# Altium PCB main_old.PcbDoc (part 5 of 15)
Units mil, origin at the board's own origin, x right, y up, seen from the top; angles counter-clockwise.
Board outline 8394.55 x 5164.44 mil, 7 copper layers (Top Layer 1, Layer 2, Layer 3, Unused, Layer 4_pow, Layer 5_gnd, Bottom 6+gnd), stack 46.112 mil thick; 363 components, 409 nets, 1750 pads, 991 vias.
Unrouted connection lines stored in the file: 1.
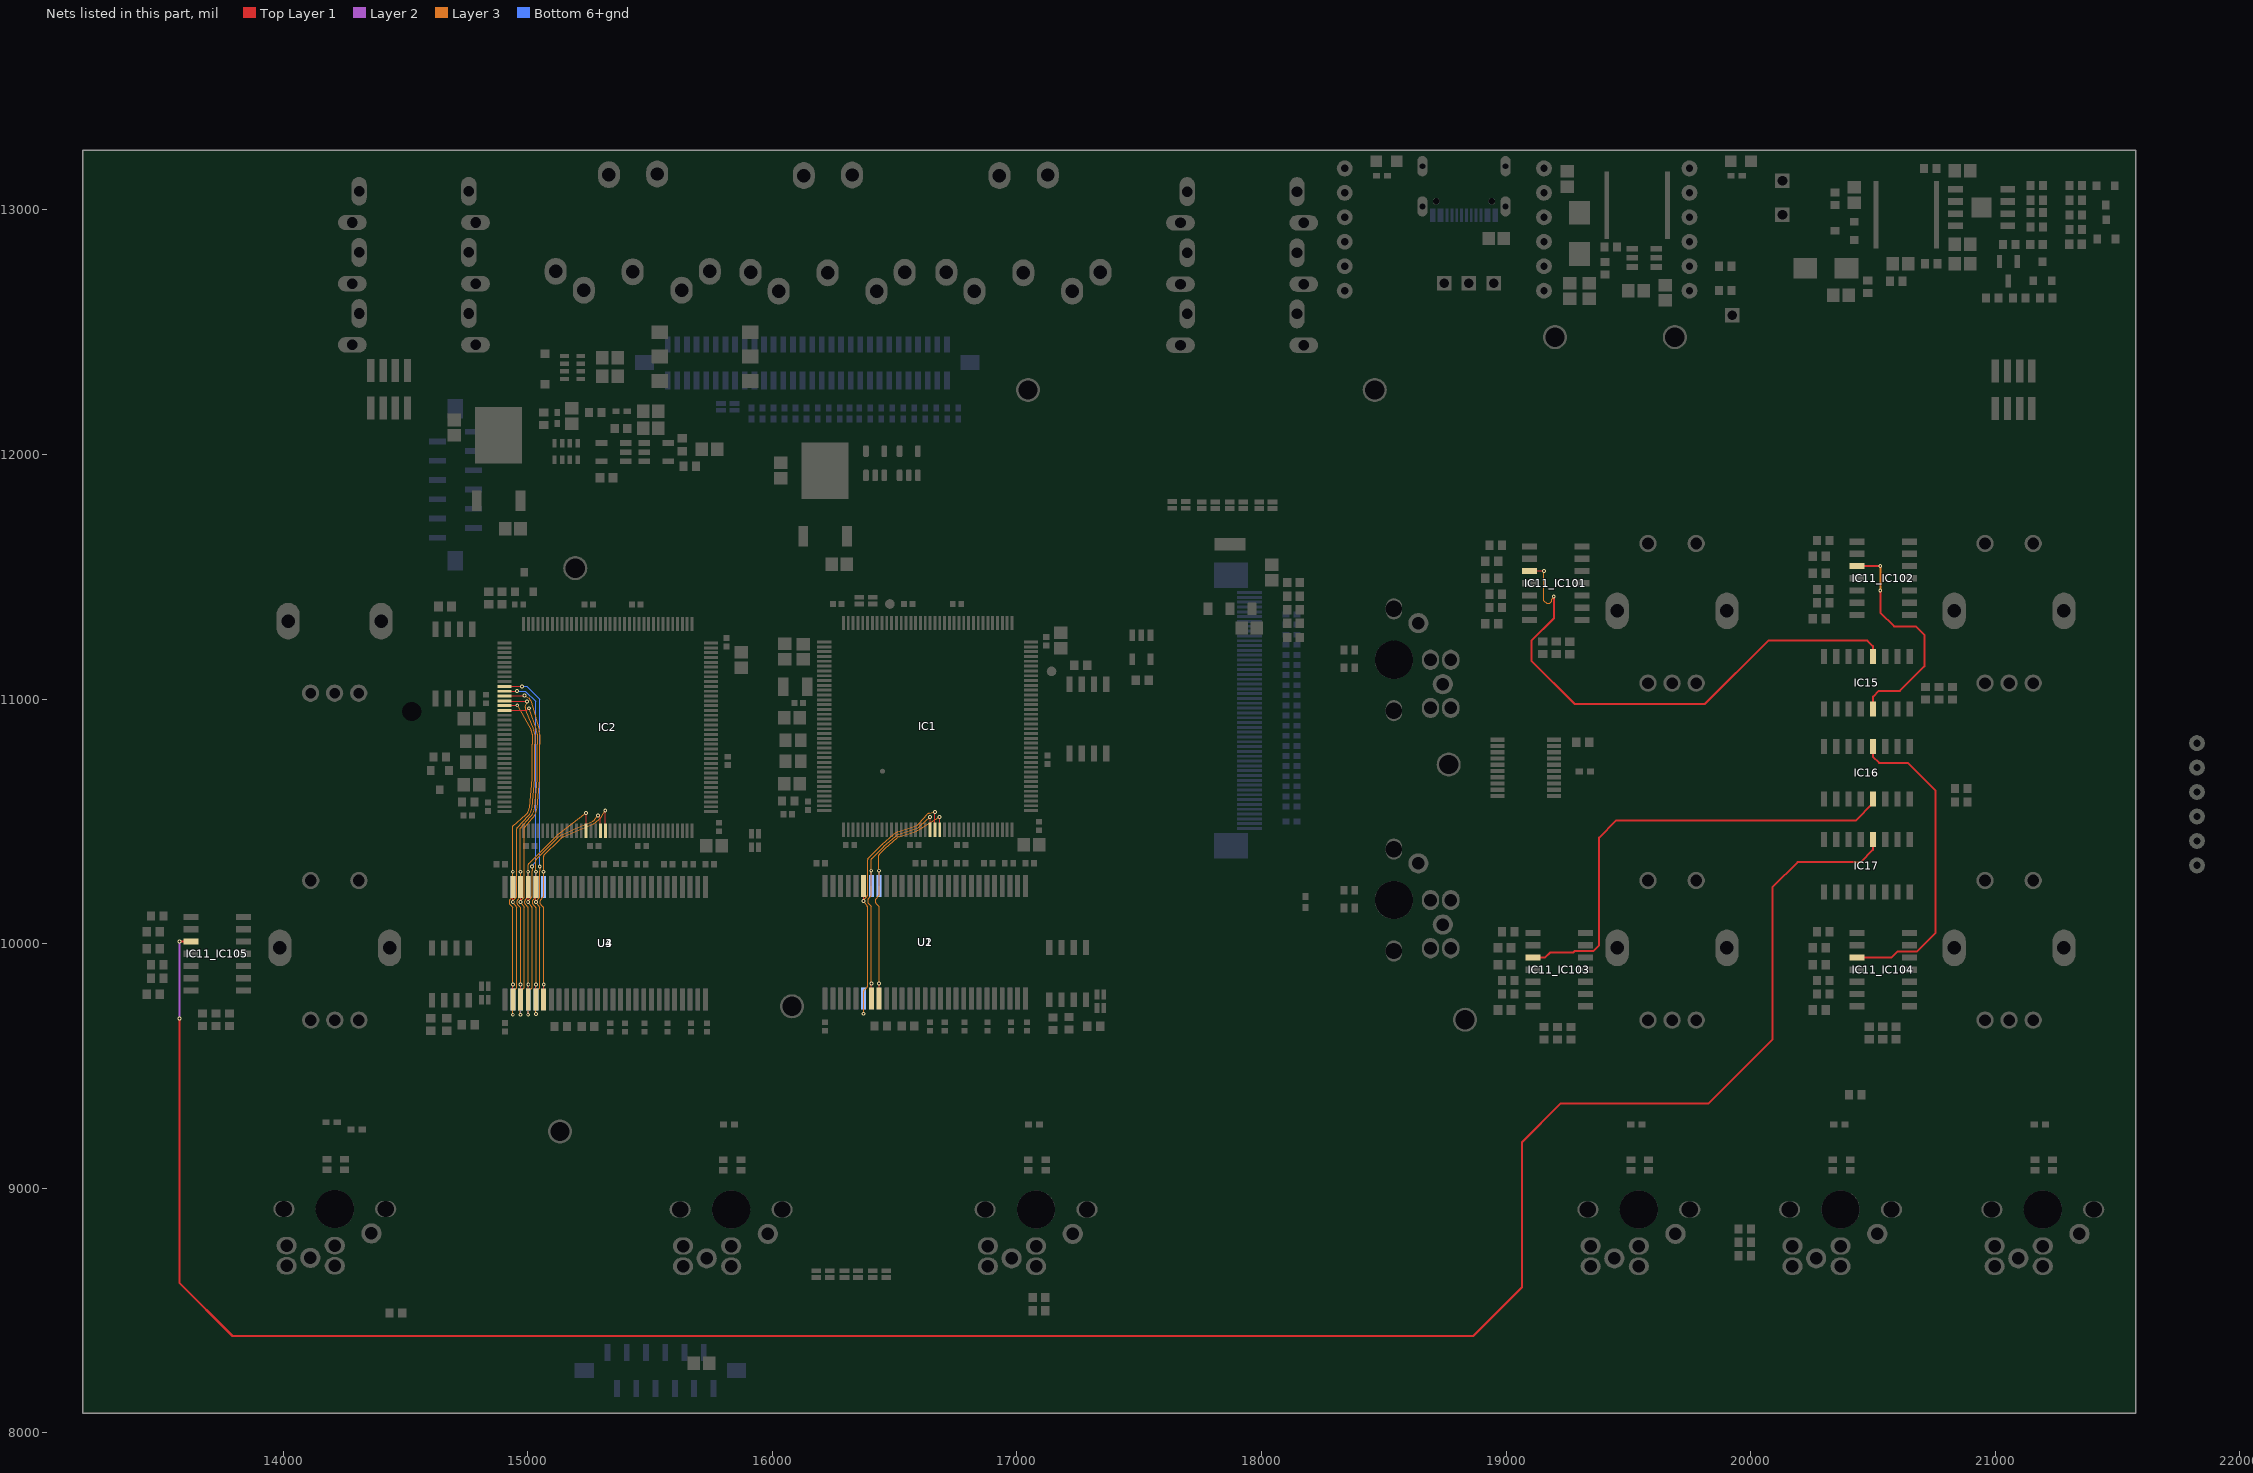
[diagram p8: the nets of this part, all layers, seen from the top]

## Via types
v1: diameter 15.75, hole 7.87, Top Layer 1 to Bottom 6+gnd, tented both sides, 923 vias
v2: diameter 27.56, hole 11.81, Top Layer 1 to Bottom 6+gnd, 45 vias
v3: diameter 23.62/23.62/23.62/23.62/23.62/23.62/23.62 (per signal layer), hole 12, Top Layer 1 to Bottom 6+gnd, tented top, 10 vias
v4: diameter 15.75, hole 7.87, Top Layer 1 to Bottom 6+gnd, 10 vias
v5: diameter 23.62/23.62/23.62/23.62/23.62/23.62/23.62 (per signal layer), hole 12, Top Layer 1 to Bottom 6+gnd, tented bottom, 3 vias

## Nets (pads, with @x,y where several pads share a name; then routed paths per layer and width w, separated by ;. In a path a pad name is that pad's centre, name@x,y a point inside that pad or via, vN(x,y) a via of type N, cw(c..) or ccw(c..) an arc to the next point about the centre after c; other vN are vias at no path point) (continued)
A9: IC1.55 U1.34 U2.34 | length 1531.6
  Top Layer 1 w5: U1.34@16404.53,9775.59 v1@16404.53,9837.43 ; U1.34@16404.77,9775.83 v1(16404.77,9837.68) ; U1.34@16405.02,9775.59 v1@16405.02,9837.43 ; IC1.55@16644.84,10466.06 v1@16644.84,10518.35
  Layer 3 w5: v1(16404.77,9837.68) 16404.77,10149.83 ; 16404.77,10199.75 16404.77,10297.82 v1(16404.28,10298.31) 16404.28,10344.65 ; v1(16644.61,10518.58) 16604.74,10481.61 cw(c16567.09,10522.2) 16584.26,10469.56 16515.96,10447.27 ; 16403.32,10153.31 cw(c16399.77,10149.78) 16404.77,10149.87 ; 16403.32,10153.31 cw(c16399.77,10149.78) 16404.77,10149.87 ; 16403.32,10153.31 cw(c16399.77,10149.78) 16404.77,10149.87 ; 16403.32,10153.31 cw(c16399.77,10149.78) 16404.77,10149.87 ; 16403.32,10153.31 cw(c16399.77,10149.78) 16404.77,10149.87 ; 16403.32,10153.31 cw(c16399.77,10149.78) 16404.77,10149.87 ; 16403.32,10153.31 cw(c16399.77,10149.78) 16404.77,10149.87 ; 16403.32,10153.31 cw(c16399.77,10149.78) 16404.77,10149.87 ; 16403.32,10153.31 cw(c16399.77,10149.78) 16404.77,10149.87 ; 16403.32,10153.31 cw(c16399.77,10149.78) 16404.77,10149.87 ; 16403.32,10153.31 cw(c16399.77,10149.78) 16404.77,10149.87 ; 16403.32,10153.31 cw(c16399.77,10149.78) 16404.77,10149.87 ; 16403.32,10153.31 cw(c16399.77,10149.78) 16404.77,10149.87 ; 16403.32,10153.31 cw(c16399.77,10149.78) 16404.77,10149.87 ; 16403.32,10153.31 cw(c16399.77,10149.78) 16404.77,10149.87 ; 16403.32,10153.31 cw(c16399.77,10149.78) 16404.77,10149.87 ; 16403.32,10153.31 16393.39,10163.28 cw(c16404.28,10174.13) 16392.76,10184.31 16403.52,10196.48 ; 16403.52,10196.48 ccw(c16399.77,10199.79) 16404.77,10199.7 ; 16403.52,10196.48 ccw(c16399.77,10199.79) 16404.77,10199.7 ; 16403.52,10196.48 ccw(c16399.77,10199.79) 16404.77,10199.7 ; 16403.52,10196.48 ccw(c16399.77,10199.79) 16404.77,10199.7 ; 16403.52,10196.48 ccw(c16399.77,10199.79) 16404.77,10199.7 ; 16403.52,10196.48 ccw(c16399.77,10199.79) 16404.77,10199.7 ; 16403.52,10196.48 ccw(c16399.77,10199.79) 16404.77,10199.7 ; 16403.52,10196.48 ccw(c16399.77,10199.79) 16404.77,10199.7 ; 16403.52,10196.48 ccw(c16399.77,10199.79) 16404.77,10199.7 ; 16403.52,10196.48 ccw(c16399.77,10199.79) 16404.77,10199.7 ; 16403.52,10196.48 ccw(c16399.77,10199.79) 16404.77,10199.7 ; 16403.52,10196.48 ccw(c16399.77,10199.79) 16404.77,10199.7 ; 16403.52,10196.48 ccw(c16399.77,10199.79) 16404.77,10199.7 ; 16403.52,10196.48 ccw(c16399.77,10199.79) 16404.77,10199.7 ; 16403.52,10196.48 ccw(c16399.77,10199.79) 16404.77,10199.7 ; 16403.52,10196.48 ccw(c16399.77,10199.79) 16404.77,10199.7 ; 16404.28,10344.65 cw(c16409.28,10344.65) 16405.73,10348.17 ; 16404.28,10344.65 cw(c16409.28,10344.65) 16405.73,10348.17 ; 16404.28,10344.65 cw(c16409.28,10344.65) 16405.73,10348.17 ; 16404.28,10344.65 cw(c16409.28,10344.65) 16405.73,10348.17 ; 16404.28,10344.65 cw(c16409.28,10344.65) 16405.73,10348.17 ; 16404.28,10344.65 cw(c16409.28,10344.65) 16405.73,10348.17 ; 16404.28,10344.65 cw(c16409.28,10344.65) 16405.73,10348.17 ; 16404.28,10344.65 cw(c16409.28,10344.65) 16405.73,10348.17 ; 16404.28,10344.65 cw(c16409.28,10344.65) 16405.73,10348.17 ; 16404.28,10344.65 cw(c16409.28,10344.65) 16405.73,10348.17 ; 16404.28,10344.65 cw(c16409.28,10344.65) 16405.73,10348.17 ; 16404.28,10344.65 cw(c16409.28,10344.65) 16405.73,10348.17 ; 16404.28,10344.65 cw(c16409.28,10344.65) 16405.73,10348.17 ; 16404.28,10344.65 cw(c16409.28,10344.65) 16405.73,10348.17 ; 16404.28,10344.65 cw(c16409.28,10344.65) 16405.73,10348.17 ; 16404.28,10344.65 cw(c16409.28,10344.65) 16405.73,10348.17 ; 16405.73,10348.17 16454.65,10397.09 ; 16454.65,10397.09 cw(c16472.28,10379.36) 16455.77,10398.14 ; 16454.65,10397.09 cw(c16472.28,10379.36) 16455.77,10398.14 ; 16454.65,10397.09 cw(c16472.28,10379.36) 16455.77,10398.14 ; 16454.65,10397.09 cw(c16472.28,10379.36) 16455.77,10398.14 ; 16454.65,10397.09 cw(c16472.28,10379.36) 16455.77,10398.14 ; 16454.65,10397.09 cw(c16472.28,10379.36) 16455.77,10398.14 ; 16454.65,10397.09 cw(c16472.28,10379.36) 16455.77,10398.14 ; 16454.65,10397.09 cw(c16472.28,10379.36) 16455.77,10398.14 ; 16454.65,10397.09 cw(c16472.28,10379.36) 16455.77,10398.14 ; 16454.65,10397.09 cw(c16472.28,10379.36) 16455.77,10398.14 ; 16454.65,10397.09 cw(c16472.28,10379.36) 16455.77,10398.14 ; 16454.65,10397.09 cw(c16472.28,10379.36) 16455.77,10398.14 ; 16454.65,10397.09 cw(c16472.28,10379.36) 16455.77,10398.14 ; 16454.65,10397.09 cw(c16472.28,10379.36) 16455.77,10398.14 ; 16454.65,10397.09 cw(c16472.28,10379.36) 16455.77,10398.14 ; 16454.65,10397.09 cw(c16472.28,10379.36) 16455.77,10398.14 ; 16455.77,10398.14 16503.36,10440.1 ; 16503.36,10440.1 cw(c16526.79,10413.6) 16515.96,10447.27 ; 16503.36,10440.1 cw(c16526.79,10413.6) 16515.96,10447.27 ; 16503.36,10440.1 cw(c16526.79,10413.6) 16515.96,10447.27 ; 16503.36,10440.1 cw(c16526.79,10413.6) 16515.96,10447.27 ; 16503.36,10440.1 cw(c16526.79,10413.6) 16515.96,10447.27 ; 16503.36,10440.1 cw(c16526.79,10413.6) 16515.96,10447.27 ; 16503.36,10440.1 cw(c16526.79,10413.6) 16515.96,10447.27 ; 16503.36,10440.1 cw(c16526.79,10413.6) 16515.96,10447.27 ; 16503.36,10440.1 cw(c16526.79,10413.6) 16515.96,10447.27 ; 16503.36,10440.1 cw(c16526.79,10413.6) 16515.96,10447.27 ; 16503.36,10440.1 cw(c16526.79,10413.6) 16515.96,10447.27 ; 16503.36,10440.1 cw(c16526.79,10413.6) 16515.96,10447.27 ; 16503.36,10440.1 cw(c16526.79,10413.6) 16515.96,10447.27 ; 16503.36,10440.1 cw(c16526.79,10413.6) 16515.96,10447.27 ; 16503.36,10440.1 cw(c16526.79,10413.6) 16515.96,10447.27 ; 16503.36,10440.1 cw(c16526.79,10413.6) 16515.96,10447.27
  Bottom 6+gnd w5: U2.34@16404.53,10236.22 v1@16404.53,10298.06
A10: IC1.56 U1.22 U2.22 | length 1769.5
  Top Layer 1 w5: v1@16372.79,10174.38 U1.22@16372.79,10235.97 ; IC1.56@16664.69,10465.9 v1@16664.69,10538.5
  Layer 3 w5: v1(16372.79,9713.5) 16372.79,9805.11 cw(c16377.79,9805.12) 16374.23,9808.63 16387.45,9821.89 ; v1(16372.79,10174.13) ccw(c16376.94,10176.92) 16372.87,10174.01 16387.98,10152.83 ; v1@16372.79,10179.83 16372.79,10179.7 cw(c16376.94,10176.92) 16373.37,10180.41 16387.45,10194.54 ; 16388.91,9825.38 16388.91,10150.02 ; v1(16664.61,10538.58) 16641.39,10533.62 ccw(c16644.61,10518.58) 16633.03,10528.7 16601.25,10492.34 ; 16387.45,9821.89 ccw(c16383.91,9825.42) 16388.91,9825.33 ; 16387.45,9821.89 ccw(c16383.91,9825.42) 16388.91,9825.33 ; 16387.45,9821.89 ccw(c16383.91,9825.42) 16388.91,9825.33 ; 16387.45,9821.89 ccw(c16383.91,9825.42) 16388.91,9825.33 ; 16387.45,9821.89 ccw(c16383.91,9825.42) 16388.91,9825.33 ; 16387.45,9821.89 ccw(c16383.91,9825.42) 16388.91,9825.33 ; 16387.45,9821.89 ccw(c16383.91,9825.42) 16388.91,9825.33 ; 16387.45,9821.89 ccw(c16383.91,9825.42) 16388.91,9825.33 ; 16387.45,9821.89 ccw(c16383.91,9825.42) 16388.91,9825.33 ; 16387.45,9821.89 ccw(c16383.91,9825.42) 16388.91,9825.33 ; 16387.45,9821.89 ccw(c16383.91,9825.42) 16388.91,9825.33 ; 16387.45,9821.89 ccw(c16383.91,9825.42) 16388.91,9825.33 ; 16387.45,9821.89 ccw(c16383.91,9825.42) 16388.91,9825.33 ; 16387.45,9821.89 ccw(c16383.91,9825.42) 16388.91,9825.33 ; 16387.45,9821.89 ccw(c16383.91,9825.42) 16388.91,9825.33 ; 16387.45,9821.89 ccw(c16383.91,9825.42) 16388.91,9825.33 ; 16387.45,10194.54 ccw(c16383.91,10198.07) 16388.91,10197.98 ; 16387.45,10194.54 ccw(c16383.91,10198.07) 16388.91,10197.98 ; 16387.45,10194.54 ccw(c16383.91,10198.07) 16388.91,10197.98 ; 16387.45,10194.54 ccw(c16383.91,10198.07) 16388.91,10197.98 ; 16387.45,10194.54 ccw(c16383.91,10198.07) 16388.91,10197.98 ; 16387.45,10194.54 ccw(c16383.91,10198.07) 16388.91,10197.98 ; 16387.45,10194.54 ccw(c16383.91,10198.07) 16388.91,10197.98 ; 16387.45,10194.54 ccw(c16383.91,10198.07) 16388.91,10197.98 ; 16387.45,10194.54 ccw(c16383.91,10198.07) 16388.91,10197.98 ; 16387.45,10194.54 ccw(c16383.91,10198.07) 16388.91,10197.98 ; 16387.45,10194.54 ccw(c16383.91,10198.07) 16388.91,10197.98 ; 16387.45,10194.54 ccw(c16383.91,10198.07) 16388.91,10197.98 ; 16387.45,10194.54 ccw(c16383.91,10198.07) 16388.91,10197.98 ; 16387.45,10194.54 ccw(c16383.91,10198.07) 16388.91,10197.98 ; 16387.45,10194.54 ccw(c16383.91,10198.07) 16388.91,10197.98 ; 16387.45,10194.54 ccw(c16383.91,10198.07) 16388.91,10197.98 ; 16387.98,10152.83 cw(c16383.91,10149.93) 16388.91,10150.02 ; 16387.98,10152.83 cw(c16383.91,10149.93) 16388.91,10150.02 ; 16387.98,10152.83 cw(c16383.91,10149.93) 16388.91,10150.02 ; 16387.98,10152.83 cw(c16383.91,10149.93) 16388.91,10150.02 ; 16387.98,10152.83 cw(c16383.91,10149.93) 16388.91,10150.02 ; 16387.98,10152.83 cw(c16383.91,10149.93) 16388.91,10150.02 ; 16387.98,10152.83 cw(c16383.91,10149.93) 16388.91,10150.02 ; 16387.98,10152.83 cw(c16383.91,10149.93) 16388.91,10150.02 ; 16387.98,10152.83 cw(c16383.91,10149.93) 16388.91,10150.02 ; 16387.98,10152.83 cw(c16383.91,10149.93) 16388.91,10150.02 ; 16387.98,10152.83 cw(c16383.91,10149.93) 16388.91,10150.02 ; 16387.98,10152.83 cw(c16383.91,10149.93) 16388.91,10150.02 ; 16387.98,10152.83 cw(c16383.91,10149.93) 16388.91,10150.02 ; 16387.98,10152.83 cw(c16383.91,10149.93) 16388.91,10150.02 ; 16387.98,10152.83 cw(c16383.91,10149.93) 16388.91,10150.02 ; 16387.98,10152.83 cw(c16383.91,10149.93) 16388.91,10150.02 ; 16388.91,10198.02 16388.91,10343.42 ; 16388.91,10343.42 cw(c16393.91,10343.42) 16390.35,10346.93 ; 16388.91,10343.42 cw(c16393.91,10343.42) 16390.35,10346.93 ; 16388.91,10343.42 cw(c16393.91,10343.42) 16390.35,10346.93 ; 16388.91,10343.42 cw(c16393.91,10343.42) 16390.35,10346.93 ; 16388.91,10343.42 cw(c16393.91,10343.42) 16390.35,10346.93 ; 16388.91,10343.42 cw(c16393.91,10343.42) 16390.35,10346.93 ; 16388.91,10343.42 cw(c16393.91,10343.42) 16390.35,10346.93 ; 16388.91,10343.42 cw(c16393.91,10343.42) 16390.35,10346.93 ; 16388.91,10343.42 cw(c16393.91,10343.42) 16390.35,10346.93 ; 16388.91,10343.42 cw(c16393.91,10343.42) 16390.35,10346.93 ; 16388.91,10343.42 cw(c16393.91,10343.42) 16390.35,10346.93 ; 16388.91,10343.42 cw(c16393.91,10343.42) 16390.35,10346.93 ; 16388.91,10343.42 cw(c16393.91,10343.42) 16390.35,10346.93 ; 16388.91,10343.42 cw(c16393.91,10343.42) 16390.35,10346.93 ; 16388.91,10343.42 cw(c16393.91,10343.42) 16390.35,10346.93 ; 16388.91,10343.42 cw(c16393.91,10343.42) 16390.35,10346.93 ; 16390.35,10346.93 16447.6,10404.18 cw(c16472.28,10379.36) 16449.13,10405.61 16496.77,10447.63 cw(c16526.79,10413.6) 16512.84,10456.77 16581.16,10479.07 ; 16581.16,10479.07 ccw(c16567.09,10522.2) 16601.25,10492.34 ; 16581.16,10479.07 ccw(c16567.09,10522.2) 16601.25,10492.34 ; 16581.16,10479.07 ccw(c16567.09,10522.2) 16601.25,10492.34 ; 16581.16,10479.07 ccw(c16567.09,10522.2) 16601.25,10492.34 ; 16581.16,10479.07 ccw(c16567.09,10522.2) 16601.25,10492.34 ; 16581.16,10479.07 ccw(c16567.09,10522.2) 16601.25,10492.34 ; 16581.16,10479.07 ccw(c16567.09,10522.2) 16601.25,10492.34 ; 16581.16,10479.07 ccw(c16567.09,10522.2) 16601.25,10492.34 ; 16581.16,10479.07 ccw(c16567.09,10522.2) 16601.25,10492.34 ; 16581.16,10479.07 ccw(c16567.09,10522.2) 16601.25,10492.34 ; 16581.16,10479.07 ccw(c16567.09,10522.2) 16601.25,10492.34 ; 16581.16,10479.07 ccw(c16567.09,10522.2) 16601.25,10492.34 ; 16581.16,10479.07 ccw(c16567.09,10522.2) 16601.25,10492.34 ; 16581.16,10479.07 ccw(c16567.09,10522.2) 16601.25,10492.34 ; 16581.16,10479.07 ccw(c16567.09,10522.2) 16601.25,10492.34 ; 16581.16,10479.07 ccw(c16567.09,10522.2) 16601.25,10492.34
  Bottom 6+gnd w5: v1@16373.03,9713.75 U2.22@16373.03,9775.59
A11: IC1.57 U1.35 U2.35 | length 1544.4
  Top Layer 1 w5: U1.35@16436.02,9775.59 v1@16436.02,9837.43 ; U1.35@16436.27,9775.83 v1(16436.27,9837.68) ; U1.35@16436.51,9775.59 v1@16436.51,9837.43 ; IC1.57@16684.21,10466.06 v1@16684.21,10518.35
  Layer 3 w5: v1(16436.27,9837.68) 16436.27,10149.83 ; 16436.27,10199.75 16436.27,10297.82 v1(16435.78,10298.31) 16435.78,10362 ; v1(16683.98,10518.58) 16601.93,10466.89 ; 16434.81,10153.31 cw(c16431.27,10149.78) 16436.27,10149.87 ; 16434.81,10153.31 cw(c16431.27,10149.78) 16436.27,10149.87 ; 16434.81,10153.31 cw(c16431.27,10149.78) 16436.27,10149.87 ; 16434.81,10153.31 cw(c16431.27,10149.78) 16436.27,10149.87 ; 16434.81,10153.31 cw(c16431.27,10149.78) 16436.27,10149.87 ; 16434.81,10153.31 cw(c16431.27,10149.78) 16436.27,10149.87 ; 16434.81,10153.31 cw(c16431.27,10149.78) 16436.27,10149.87 ; 16434.81,10153.31 cw(c16431.27,10149.78) 16436.27,10149.87 ; 16434.81,10153.31 cw(c16431.27,10149.78) 16436.27,10149.87 ; 16434.81,10153.31 cw(c16431.27,10149.78) 16436.27,10149.87 ; 16434.81,10153.31 cw(c16431.27,10149.78) 16436.27,10149.87 ; 16434.81,10153.31 cw(c16431.27,10149.78) 16436.27,10149.87 ; 16434.81,10153.31 cw(c16431.27,10149.78) 16436.27,10149.87 ; 16434.81,10153.31 cw(c16431.27,10149.78) 16436.27,10149.87 ; 16434.81,10153.31 cw(c16431.27,10149.78) 16436.27,10149.87 ; 16434.81,10153.31 cw(c16431.27,10149.78) 16436.27,10149.87 ; 16434.81,10153.31 16424.88,10163.28 cw(c16435.78,10174.13) 16424.26,10184.31 16435.01,10196.48 ; 16435.01,10196.48 ccw(c16431.27,10199.79) 16436.27,10199.7 ; 16435.01,10196.48 ccw(c16431.27,10199.79) 16436.27,10199.7 ; 16435.01,10196.48 ccw(c16431.27,10199.79) 16436.27,10199.7 ; 16435.01,10196.48 ccw(c16431.27,10199.79) 16436.27,10199.7 ; 16435.01,10196.48 ccw(c16431.27,10199.79) 16436.27,10199.7 ; 16435.01,10196.48 ccw(c16431.27,10199.79) 16436.27,10199.7 ; 16435.01,10196.48 ccw(c16431.27,10199.79) 16436.27,10199.7 ; 16435.01,10196.48 ccw(c16431.27,10199.79) 16436.27,10199.7 ; 16435.01,10196.48 ccw(c16431.27,10199.79) 16436.27,10199.7 ; 16435.01,10196.48 ccw(c16431.27,10199.79) 16436.27,10199.7 ; 16435.01,10196.48 ccw(c16431.27,10199.79) 16436.27,10199.7 ; 16435.01,10196.48 ccw(c16431.27,10199.79) 16436.27,10199.7 ; 16435.01,10196.48 ccw(c16431.27,10199.79) 16436.27,10199.7 ; 16435.01,10196.48 ccw(c16431.27,10199.79) 16436.27,10199.7 ; 16435.01,10196.48 ccw(c16431.27,10199.79) 16436.27,10199.7 ; 16435.01,10196.48 ccw(c16431.27,10199.79) 16436.27,10199.7 ; 16435.78,10362 cw(c16440.78,10362) 16437.22,10365.52 ; 16435.78,10362 cw(c16440.78,10362) 16437.22,10365.52 ; 16435.78,10362 cw(c16440.78,10362) 16437.22,10365.52 ; 16435.78,10362 cw(c16440.78,10362) 16437.22,10365.52 ; 16435.78,10362 cw(c16440.78,10362) 16437.22,10365.52 ; 16435.78,10362 cw(c16440.78,10362) 16437.22,10365.52 ; 16435.78,10362 cw(c16440.78,10362) 16437.22,10365.52 ; 16435.78,10362 cw(c16440.78,10362) 16437.22,10365.52 ; 16435.78,10362 cw(c16440.78,10362) 16437.22,10365.52 ; 16435.78,10362 cw(c16440.78,10362) 16437.22,10365.52 ; 16435.78,10362 cw(c16440.78,10362) 16437.22,10365.52 ; 16435.78,10362 cw(c16440.78,10362) 16437.22,10365.52 ; 16435.78,10362 cw(c16440.78,10362) 16437.22,10365.52 ; 16435.78,10362 cw(c16440.78,10362) 16437.22,10365.52 ; 16435.78,10362 cw(c16440.78,10362) 16437.22,10365.52 ; 16435.78,10362 cw(c16440.78,10362) 16437.22,10365.52 ; 16437.22,10365.52 16461.71,10390 cw(c16472.28,10379.36) 16462.35,10390.61 16510,10432.63 cw(c16526.79,10413.6) 16519.06,10437.77 16587.37,10460.05 ; 16587.37,10460.06 ccw(c16567.09,10522.2) 16601.93,10466.89 ; 16587.37,10460.06 ccw(c16567.09,10522.2) 16601.93,10466.89 ; 16587.37,10460.06 ccw(c16567.09,10522.2) 16601.93,10466.89 ; 16587.37,10460.06 ccw(c16567.09,10522.2) 16601.93,10466.89 ; 16587.37,10460.06 ccw(c16567.09,10522.2) 16601.93,10466.89 ; 16587.37,10460.06 ccw(c16567.09,10522.2) 16601.93,10466.89 ; 16587.37,10460.06 ccw(c16567.09,10522.2) 16601.93,10466.89 ; 16587.37,10460.06 ccw(c16567.09,10522.2) 16601.93,10466.89 ; 16587.37,10460.06 ccw(c16567.09,10522.2) 16601.93,10466.89 ; 16587.37,10460.06 ccw(c16567.09,10522.2) 16601.93,10466.89 ; 16587.37,10460.06 ccw(c16567.09,10522.2) 16601.93,10466.89 ; 16587.37,10460.06 ccw(c16567.09,10522.2) 16601.93,10466.89 ; 16587.37,10460.06 ccw(c16567.09,10522.2) 16601.93,10466.89 ; 16587.37,10460.06 ccw(c16567.09,10522.2) 16601.93,10466.89 ; 16587.37,10460.06 ccw(c16567.09,10522.2) 16601.93,10466.89 ; 16587.37,10460.06 ccw(c16567.09,10522.2) 16601.93,10466.89
  Bottom 6+gnd w5: U2.35@16436.02,10236.22 v1@16436.02,10298.06
A_ENC1: IC11_IC101.10 IC15.12 | length 2171.5
  Top Layer 1 w5: IC11_IC101.10@19095.43,11523.82 v1(19155,11523.82)
  Top Layer 1 w8: v1(19195,11418.82) 19195,11329.56 19103.7,11238.26 19103.7,11156.32 19280.09,10979.93 19813.26,10979.93 20072.66,11239.33 20477,11239.33 20500,11216.33 IC15.12@20500,11173.82
  Layer 3 w5: v1(19155,11523.82) 19155,11402.53 19165.6,11391.93 19178.34,11391.93 19187.34,11400.94 19187.34,11408.25 19195,11415.91 v1(19195,11418.82)
A_ENC2: IC11_IC102.10 IC15.5 | length 943.5
  Top Layer 1 w8: IC11_IC102.10@20435,11543.82 v1(20530,11543.82) ; IC15.5@20500,10959.25 20500.66,10959.92 20500.66,11010.32 20524.17,11033.82 20609.94,11033.82 20710,11133.88 20710,11262.77 20675.8,11296.97 20586.85,11296.97 20530,11353.82 v1(20530,11443.82)
  Layer 3 w8: v1(20530,11443.82) v1(20530,11543.82)
A_ENC3: IC11_IC103.10 IC16.5 | length 1926.6
  Top Layer 1 w8: IC11_IC103.10@19110.43,9943.82 19160,9943.82 19180,9963.82 19275,9963.82 19281.74,9970.56 19357.77,9970.56 19380,9992.78 19380,10433.82 19449.06,10502.88 20429.06,10502.88 20500,10573.82 IC16.5@20500,10591.53
A_ENC4: IC11_IC104.10 IC16.12 | length 1298.6
  Top Layer 1 w8: IC11_IC104.10@20435,9943.82 20490,9943.82 20576.05,9943.82 20601.05,9968.82 20680.6,9968.82 20755,10043.22 20755,10626.52 20642.7,10738.82 20525,10738.82 20500,10763.82 IC16.12@20500,10806.1
A_ENC5: IC11_IC105.10 IC17.12 | length 10037
  Top Layer 1 w8: v1(13575,9693.82) 13575,8613.22 13792.4,8395.82 18865.77,8395.82 19065,8595.05 19065,9188.82 19222,9345.82 19827,9345.82 20090,9608.82 20090,10232.05 20191.77,10333.82 20450,10333.82 20500,10383.82 IC17.12@20500,10426.1 ; v1(13575,10008.82) IC11_IC105.10@13622.72,10008.82
  Layer 2 w8: v1(13575,9693.82) v1(13575,10008.82)
AA0: IC2.10 U3.23 U4.23 | length 1693
  Top Layer 1 w5: IC2.10@14903.94,11051.95 IC2.10@14904,11051.95 v1@14976.54,11051.95 ; v1(15032.99,10169.94) 15033.24,10169.94 U3.23@15033.24,10232.03
  Layer 3 w5: v1(15032.87,9711.82) 15032.87,9802.87 15049.11,9819.12 15049.11,10145.78 ; v1(15048.82,10315.92) 15049.11,10298.12 ; 15049.11,10193.83 15049.11,10298.06 ; 15048.06,10148.8 cw(c15044.11,10145.74) 15049.11,10145.83 ; 15048.06,10148.8 cw(c15044.11,10145.74) 15049.11,10145.83 ; 15048.06,10148.8 cw(c15044.11,10145.74) 15049.11,10145.83 ; 15048.06,10148.8 cw(c15044.11,10145.74) 15049.11,10145.83 ; 15048.06,10148.8 cw(c15044.11,10145.74) 15049.11,10145.83 ; 15048.06,10148.8 cw(c15044.11,10145.74) 15049.11,10145.83 ; 15048.06,10148.8 cw(c15044.11,10145.74) 15049.11,10145.83 ; 15048.06,10148.8 cw(c15044.11,10145.74) 15049.11,10145.83 ; 15048.06,10148.8 cw(c15044.11,10145.74) 15049.11,10145.83 ; 15048.06,10148.8 cw(c15044.11,10145.74) 15049.11,10145.83 ; 15048.06,10148.8 cw(c15044.11,10145.74) 15049.11,10145.83 ; 15048.06,10148.8 cw(c15044.11,10145.74) 15049.11,10145.83 ; 15048.06,10148.8 cw(c15044.11,10145.74) 15049.11,10145.83 ; 15048.06,10148.8 cw(c15044.11,10145.74) 15049.11,10145.83 ; 15048.06,10148.8 cw(c15044.11,10145.74) 15049.11,10145.83 ; 15048.06,10148.8 cw(c15044.11,10145.74) 15049.11,10145.83 ; 15048.06,10148.8 15034.07,10166.84 cw(c15037.99,10169.94) v1(15032.99,10169.94) 15032.99,10170 cw(c15037.99,10169.94) 15034.06,10173.04 15048.04,10190.79 ; 15048.04,10190.79 ccw(c15044.11,10193.88) 15049.11,10193.79 ; 15048.04,10190.79 ccw(c15044.11,10193.88) 15049.11,10193.79 ; 15048.04,10190.79 ccw(c15044.11,10193.88) 15049.11,10193.79 ; 15048.04,10190.79 ccw(c15044.11,10193.88) 15049.11,10193.79 ; 15048.04,10190.79 ccw(c15044.11,10193.88) 15049.11,10193.79 ; 15048.04,10190.79 ccw(c15044.11,10193.88) 15049.11,10193.79 ; 15048.04,10190.79 ccw(c15044.11,10193.88) 15049.11,10193.79 ; 15048.04,10190.79 ccw(c15044.11,10193.88) 15049.11,10193.79 ; 15048.04,10190.79 ccw(c15044.11,10193.88) 15049.11,10193.79 ; 15048.04,10190.79 ccw(c15044.11,10193.88) 15049.11,10193.79 ; 15048.04,10190.79 ccw(c15044.11,10193.88) 15049.11,10193.79 ; 15048.04,10190.79 ccw(c15044.11,10193.88) 15049.11,10193.79 ; 15048.04,10190.79 ccw(c15044.11,10193.88) 15049.11,10193.79 ; 15048.04,10190.79 ccw(c15044.11,10193.88) 15049.11,10193.79 ; 15048.04,10190.79 ccw(c15044.11,10193.88) 15049.11,10193.79 ; 15048.04,10190.79 ccw(c15044.11,10193.88) 15049.11,10193.79 ; 15049.11,10298.06 ccw(c15044.11,10298.04) 15049.11,10298.12 ; 15049.11,10298.06 ccw(c15044.11,10298.04) 15049.11,10298.12 ; 15049.11,10298.06 ccw(c15044.11,10298.04) 15049.11,10298.12 ; 15049.11,10298.06 ccw(c15044.11,10298.04) 15049.11,10298.12 ; 15049.11,10298.06 ccw(c15044.11,10298.04) 15049.11,10298.12
  Bottom 6+gnd w5: v1(14976.62,11052.03) 14996.56,11052.03 15048.82,10999.77 v1(15048.82,10315.92) ; v1@15033.24,9709.56 U4.23@15033.24,9771.4
AA1: IC2.11 U3.24 U4.24 | length 1673
  Top Layer 1 w5: IC2.11@14904.1,11032.42 14904.14,11032.46 14955.29,11032.46 v1(14955.49,11032.66) ; v1@15001.74,10170.19 U3.24@15001.74,10232.03
  Layer 3 w5: v1(15001.49,9709.31) 15001.49,9803 15017.62,9819.12 15017.62,10145.78 ; v1(15001.49,10169.94) ccw(c15005.65,10172.73) 15001.58,10169.82 15016.69,10148.64 ; v1@15001.49,10175.64 15001.49,10175.51 cw(c15005.65,10172.73) 15002.08,10176.22 15016.16,10190.35 ; v1(15017.33,10315.92) 15017.62,10298.12 ; 15017.62,10193.83 15017.62,10298.06 ; 15016.16,10190.35 ccw(c15012.62,10193.88) 15017.62,10193.79 ; 15016.16,10190.35 ccw(c15012.62,10193.88) 15017.62,10193.79 ; 15016.16,10190.35 ccw(c15012.62,10193.88) 15017.62,10193.79 ; 15016.16,10190.35 ccw(c15012.62,10193.88) 15017.62,10193.79 ; 15016.16,10190.35 ccw(c15012.62,10193.88) 15017.62,10193.79 ; 15016.16,10190.35 ccw(c15012.62,10193.88) 15017.62,10193.79 ; 15016.16,10190.35 ccw(c15012.62,10193.88) 15017.62,10193.79 ; 15016.16,10190.35 ccw(c15012.62,10193.88) 15017.62,10193.79 ; 15016.16,10190.35 ccw(c15012.62,10193.88) 15017.62,10193.79 ; 15016.16,10190.35 ccw(c15012.62,10193.88) 15017.62,10193.79 ; 15016.16,10190.35 ccw(c15012.62,10193.88) 15017.62,10193.79 ; 15016.16,10190.35 ccw(c15012.62,10193.88) 15017.62,10193.79 ; 15016.16,10190.35 ccw(c15012.62,10193.88) 15017.62,10193.79 ; 15016.16,10190.35 ccw(c15012.62,10193.88) 15017.62,10193.79 ; 15016.16,10190.35 ccw(c15012.62,10193.88) 15017.62,10193.79 ; 15016.16,10190.35 ccw(c15012.62,10193.88) 15017.62,10193.79 ; 15016.69,10148.64 cw(c15012.62,10145.74) 15017.62,10145.83 ; 15016.69,10148.64 cw(c15012.62,10145.74) 15017.62,10145.83 ; 15016.69,10148.64 cw(c15012.62,10145.74) 15017.62,10145.83 ; 15016.69,10148.64 cw(c15012.62,10145.74) 15017.62,10145.83 ; 15016.69,10148.64 cw(c15012.62,10145.74) 15017.62,10145.83 ; 15016.69,10148.64 cw(c15012.62,10145.74) 15017.62,10145.83 ; 15016.69,10148.64 cw(c15012.62,10145.74) 15017.62,10145.83 ; 15016.69,10148.64 cw(c15012.62,10145.74) 15017.62,10145.83 ; 15016.69,10148.64 cw(c15012.62,10145.74) 15017.62,10145.83 ; 15016.69,10148.64 cw(c15012.62,10145.74) 15017.62,10145.83 ; 15016.69,10148.64 cw(c15012.62,10145.74) 15017.62,10145.83 ; 15016.69,10148.64 cw(c15012.62,10145.74) 15017.62,10145.83 ; 15016.69,10148.64 cw(c15012.62,10145.74) 15017.62,10145.83 ; 15016.69,10148.64 cw(c15012.62,10145.74) 15017.62,10145.83 ; 15016.69,10148.64 cw(c15012.62,10145.74) 15017.62,10145.83 ; 15016.69,10148.64 cw(c15012.62,10145.74) 15017.62,10145.83 ; 15017.62,10298.06 ccw(c15012.62,10298.04) 15017.62,10298.12 ; 15017.62,10298.06 ccw(c15012.62,10298.04) 15017.62,10298.12 ; 15017.62,10298.06 ccw(c15012.62,10298.04) 15017.62,10298.12 ; 15017.62,10298.06 ccw(c15012.62,10298.04) 15017.62,10298.12 ; 15017.62,10298.06 ccw(c15012.62,10298.04) 15017.62,10298.12
  Bottom 6+gnd w5: v1(14955.49,11032.66) 14990.41,11032.66 15032.8,10990.27 15032.8,10334.3 15017.33,10318.83 v1(15017.33,10315.92) ; v1@15001.74,9709.56 U4.24@15001.74,9771.4
AA2: IC2.12 U3.25 U4.25 | length 1605
  Top Layer 1 w5: IC2.12@14903.94,11012.58 14904.97,11013.6 14985.68,11013.6 v1(14986.7,11014.63) ; v1@14970.24,10170.19 U3.25@14970.24,10232.03
  Layer 3 w5: v1(14970,9709.31) 14970,9803 14986.12,9819.12 14986.12,10145.78 ; v1(14970,10169.94) ccw(c14974.15,10172.73) 14970.08,10169.82 14985.19,10148.64 ; v1@14970,10175.51 cw(c14974.15,10172.73) 14970.58,10176.22 14984.66,10190.35 ccw(c14981.12,10193.88) 14986.12,10193.79 ; 14986.12,10193.83 14986.12,10473.57 cw(c14991.12,10473.57) 14987.39,10476.9 15018.72,10511.9 ccw(c14962.57,10562.18) 15037.66,10555.66 15047.83,10672.13 ccw(c14982.71,10677.89) 15047.9,10673.02 ccw(c14982.71,10677.9) 15048.09,10677.9 15048.09,10815.26 15048.09,10855.21 ccw(c14982.71,10855.26) 15045.67,10872.85 15019.43,10966.76 ccw(c15004.64,10962.57) 15019.39,10966.9 15011.45,10993.96 ccw(c14996.7,10989.63) 15005.16,11002.47 v1(14986.7,11014.63) ; 14985.19,10148.64 cw(c14981.12,10145.74) 14986.12,10145.83 ; 14985.19,10148.64 cw(c14981.12,10145.74) 14986.12,10145.83 ; 14985.19,10148.64 cw(c14981.12,10145.74) 14986.12,10145.83 ; 14985.19,10148.64 cw(c14981.12,10145.74) 14986.12,10145.83 ; 14985.19,10148.64 cw(c14981.12,10145.74) 14986.12,10145.83 ; 14985.19,10148.64 cw(c14981.12,10145.74) 14986.12,10145.83 ; 14985.19,10148.64 cw(c14981.12,10145.74) 14986.12,10145.83 ; 14985.19,10148.64 cw(c14981.12,10145.74) 14986.12,10145.83 ; 14985.19,10148.64 cw(c14981.12,10145.74) 14986.12,10145.83 ; 14985.19,10148.64 cw(c14981.12,10145.74) 14986.12,10145.83 ; 14985.19,10148.64 cw(c14981.12,10145.74) 14986.12,10145.83 ; 14985.19,10148.64 cw(c14981.12,10145.74) 14986.12,10145.83 ; 14985.19,10148.64 cw(c14981.12,10145.74) 14986.12,10145.83 ; 14985.19,10148.64 cw(c14981.12,10145.74) 14986.12,10145.83 ; 14985.19,10148.64 cw(c14981.12,10145.74) 14986.12,10145.83 ; 14985.19,10148.64 cw(c14981.12,10145.74) 14986.12,10145.83
  Bottom 6+gnd w5: v1@14970.24,9709.56 U4.25@14970.24,9771.4
AA3: IC2.13 U3.26 U4.26 | length 1587
  Top Layer 1 w5: IC2.13@14904.1,10993.05 14905.89,10991.26 14994.59,10991.26 v1(14996.23,10989.63) ; v1@14938.75,10170.19 U3.26@14938.75,10232.03
  Layer 3 w5: v1(14938.5,9709.31) 14938.5,9803 14954.62,9819.12 14954.62,10145.78 ; v1(14938.5,10169.94) ccw(c14942.66,10172.73) 14938.59,10169.82 14953.7,10148.64 ; v1@14938.5,10175.51 cw(c14942.66,10172.73) 14939.08,10176.22 14953.17,10190.35 ccw(c14949.62,10193.88) 14954.62,10193.79 14954.62,10470.36 cw(c14959.62,10470.36) 14955.95,10473.75 15003.12,10524.47 ccw(c14962.57,10562.18) 15017.73,10557.36 15027.91,10673.91 ccw(c14982.71,10677.89) 15027.95,10674.41 ; v1(14996.23,10989.63) 14996.36,10989.5 14996.66,10989.5 14989.9,10966.93 ccw(c15004.64,10962.57) 14990.4,10956.78 15024.74,10872.35 cw(c14982.71,10855.26) 15028.09,10855.26 15028.09,10815.26 15028.09,10677.9 cw(c14982.71,10677.9) 15027.95,10674.45 ; 14953.7,10148.64 cw(c14949.62,10145.74) 14954.62,10145.83 ; 14953.7,10148.64 cw(c14949.62,10145.74) 14954.62,10145.83 ; 14953.7,10148.64 cw(c14949.62,10145.74) 14954.62,10145.83 ; 14953.7,10148.64 cw(c14949.62,10145.74) 14954.62,10145.83 ; 14953.7,10148.64 cw(c14949.62,10145.74) 14954.62,10145.83 ; 14953.7,10148.64 cw(c14949.62,10145.74) 14954.62,10145.83 ; 14953.7,10148.64 cw(c14949.62,10145.74) 14954.62,10145.83 ; 14953.7,10148.64 cw(c14949.62,10145.74) 14954.62,10145.83 ; 14953.7,10148.64 cw(c14949.62,10145.74) 14954.62,10145.83 ; 14953.7,10148.64 cw(c14949.62,10145.74) 14954.62,10145.83 ; 14953.7,10148.64 cw(c14949.62,10145.74) 14954.62,10145.83 ; 14953.7,10148.64 cw(c14949.62,10145.74) 14954.62,10145.83 ; 14953.7,10148.64 cw(c14949.62,10145.74) 14954.62,10145.83 ; 14953.7,10148.64 cw(c14949.62,10145.74) 14954.62,10145.83 ; 14953.7,10148.64 cw(c14949.62,10145.74) 14954.62,10145.83 ; 14953.7,10148.64 cw(c14949.62,10145.74) 14954.62,10145.83
  Bottom 6+gnd w5: v1@14938.75,9709.56 U4.26@14938.75,9771.4
AA4: IC2.14 U3.29 U4.29 | length 1374.6
  Top Layer 1 w5: IC2.14@14903.94,10973.21 14904.65,10973.92 14955.99,10973.92 v1(14956.7,10974.63) ; U3.29@14938.75,9771.4 14938.75,9833.24 v1(14938.99,9833.49)
  Layer 3 w5: v1(14938.99,9833.49) 14938.99,10145.64 ccw(c14933.99,10145.64) 14937.55,10149.16 14927.66,10159.04 cw(c14938.5,10169.94) 14927,10180.15 14937.73,10192.24 ccw(c14933.99,10195.56) 14938.99,10195.56 14938.99,10293.63 v1(14938.5,10294.12) 14938.5,10479.09 cw(c14943.5,10479.09) 14940.27,10482.91 14992.24,10527.85 ccw(c14962.57,10562.18) 15007.77,10558.23 15017.95,10674.82 ccw(c14982.71,10677.89) 15017.98,10675.16 ccw(c14982.71,10677.9) 15018.09,10677.9 15018.09,10815.26 15018.09,10855.26 ccw(c14982.71,10855.26) 15013.61,10872.48 v1(14956.7,10974.63)
  Bottom 6+gnd w5: U4.29@14938.75,10232.03 v1@14938.75,10293.87
AA5: IC2.15 U3.30 U4.30 | length 1394.5
  Top Layer 1 w5: IC2.15@14904.1,10953.68 14904.5,10954.08 14996.15,10954.08 v1(15004.64,10962.57) ; U3.30@14970.24,9771.46 v1@14970.24,9833.73
  Layer 3 w5: v1(14970.49,9833.49) 14970.49,10145.64 ; 14970.49,10145.68 ccw(c14965.49,10145.59) 14969.03,10149.12 14959.1,10159.1 cw(c14970,10169.94) 14958.48,10180.12 14969.23,10192.29 ccw(c14965.49,10195.6) 14970.49,10195.51 ; 14970.49,10195.56 14970.49,10293.63 v1(14970,10294.12) 14970,10471.59 cw(c14975,10471.59) 14971.31,10474.97 15010.76,10518 ccw(c14962.57,10562.18) 15027.69,10556.49 15037.87,10673.04 ccw(c14982.71,10677.89) 15037.93,10673.73 ccw(c14982.71,10677.9) 15038.09,10677.9 15038.09,10815.26 15038.09,10855.26 ccw(c14982.71,10855.26) 15035.13,10873.12 v1(15004.64,10962.57)
  Bottom 6+gnd w5: U4.30@14970.24,10232.03 v1@14970.24,10293.87
AA6: IC2.50 U3.31 U4.31 | length 1184.5
  Top Layer 1 w5: U3.31@15001.74,9771.4 v1@15001.74,9833.24 ; IC2.50@15238.27,10461.71 v1@15238.27,10534.31
  Layer 3 w5: v1(15001.98,9833.49) 15001.98,10145.64 ; 15001.98,10195.56 15001.98,10293.63 v1(15001.49,10294.12) 15001.49,10323.38 ; v1(15238.2,10534.39) 15124.55,10447.68 ccw(c15163.98,10396.01) 15118.13,10442.09 15002.94,10326.9 ; 15000.53,10149.12 cw(c14996.98,10145.59) 15001.98,10145.68 ; 15000.53,10149.12 cw(c14996.98,10145.59) 15001.98,10145.68 ; 15000.53,10149.12 cw(c14996.98,10145.59) 15001.98,10145.68 ; 15000.53,10149.12 cw(c14996.98,10145.59) 15001.98,10145.68 ; 15000.53,10149.12 cw(c14996.98,10145.59) 15001.98,10145.68 ; 15000.53,10149.12 cw(c14996.98,10145.59) 15001.98,10145.68 ; 15000.53,10149.12 cw(c14996.98,10145.59) 15001.98,10145.68 ; 15000.53,10149.12 cw(c14996.98,10145.59) 15001.98,10145.68 ; 15000.53,10149.12 cw(c14996.98,10145.59) 15001.98,10145.68 ; 15000.53,10149.12 cw(c14996.98,10145.59) 15001.98,10145.68 ; 15000.53,10149.12 cw(c14996.98,10145.59) 15001.98,10145.68 ; 15000.53,10149.12 cw(c14996.98,10145.59) 15001.98,10145.68 ; 15000.53,10149.12 cw(c14996.98,10145.59) 15001.98,10145.68 ; 15000.53,10149.12 cw(c14996.98,10145.59) 15001.98,10145.68 ; 15000.53,10149.12 cw(c14996.98,10145.59) 15001.98,10145.68 ; 15000.53,10149.12 cw(c14996.98,10145.59) 15001.98,10145.68 ; 15000.53,10149.12 14990.6,10159.1 cw(c15001.49,10169.94) 14989.97,10180.12 15000.73,10192.29 ; 15000.73,10192.29 ccw(c14996.98,10195.6) 15001.98,10195.51 ; 15000.73,10192.29 ccw(c14996.98,10195.6) 15001.98,10195.51 ; 15000.73,10192.29 ccw(c14996.98,10195.6) 15001.98,10195.51 ; 15000.73,10192.29 ccw(c14996.98,10195.6) 15001.98,10195.51 ; 15000.73,10192.29 ccw(c14996.98,10195.6) 15001.98,10195.51 ; 15000.73,10192.29 ccw(c14996.98,10195.6) 15001.98,10195.51 ; 15000.73,10192.29 ccw(c14996.98,10195.6) 15001.98,10195.51 ; 15000.73,10192.29 ccw(c14996.98,10195.6) 15001.98,10195.51 ; 15000.73,10192.29 ccw(c14996.98,10195.6) 15001.98,10195.51 ; 15000.73,10192.29 ccw(c14996.98,10195.6) 15001.98,10195.51 ; 15000.73,10192.29 ccw(c14996.98,10195.6) 15001.98,10195.51 ; 15000.73,10192.29 ccw(c14996.98,10195.6) 15001.98,10195.51 ; 15000.73,10192.29 ccw(c14996.98,10195.6) 15001.98,10195.51 ; 15000.73,10192.29 ccw(c14996.98,10195.6) 15001.98,10195.51 ; 15000.73,10192.29 ccw(c14996.98,10195.6) 15001.98,10195.51 ; 15000.73,10192.29 ccw(c14996.98,10195.6) 15001.98,10195.51 ; 15001.49,10323.38 cw(c15006.5,10323.38) 15002.94,10326.9 ; 15001.49,10323.38 cw(c15006.5,10323.38) 15002.94,10326.9 ; 15001.49,10323.38 cw(c15006.5,10323.38) 15002.94,10326.9 ; 15001.49,10323.38 cw(c15006.5,10323.38) 15002.94,10326.9 ; 15001.49,10323.38 cw(c15006.5,10323.38) 15002.94,10326.9 ; 15001.49,10323.38 cw(c15006.5,10323.38) 15002.94,10326.9 ; 15001.49,10323.38 cw(c15006.5,10323.38) 15002.94,10326.9 ; 15001.49,10323.38 cw(c15006.5,10323.38) 15002.94,10326.9 ; 15001.49,10323.38 cw(c15006.5,10323.38) 15002.94,10326.9 ; 15001.49,10323.38 cw(c15006.5,10323.38) 15002.94,10326.9 ; 15001.49,10323.38 cw(c15006.5,10323.38) 15002.94,10326.9 ; 15001.49,10323.38 cw(c15006.5,10323.38) 15002.94,10326.9 ; 15001.49,10323.38 cw(c15006.5,10323.38) 15002.94,10326.9 ; 15001.49,10323.38 cw(c15006.5,10323.38) 15002.94,10326.9 ; 15001.49,10323.38 cw(c15006.5,10323.38) 15002.94,10326.9 ; 15001.49,10323.38 cw(c15006.5,10323.38) 15002.94,10326.9
  Bottom 6+gnd w5: U4.31@15001.74,10232.03 v1@15001.74,10293.87
AA7: IC2.53 U3.32 U4.32 | length 1309.9
  Top Layer 1 w5: U3.32@15033.24,9771.46 v1@15033.24,9833.49 ; v1(15286.7,10524.63) 15296.94,10514.39 15296.94,10462.11 IC2.53@15297.23,10461.87
  Layer 3 w5: v1(15033.48,9833.49) 15033.48,10145.64 ; 15033.48,10195.56 15033.48,10293.63 v1(15032.99,10294.12) 15032.99,10340.73 ; v1(15286.7,10524.63) 15270.8,10504.96 ; 15032.02,10149.12 cw(c15028.48,10145.59) 15033.48,10145.68 ; 15032.02,10149.12 cw(c15028.48,10145.59) 15033.48,10145.68 ; 15032.02,10149.12 cw(c15028.48,10145.59) 15033.48,10145.68 ; 15032.02,10149.12 cw(c15028.48,10145.59) 15033.48,10145.68 ; 15032.02,10149.12 cw(c15028.48,10145.59) 15033.48,10145.68 ; 15032.02,10149.12 cw(c15028.48,10145.59) 15033.48,10145.68 ; 15032.02,10149.12 cw(c15028.48,10145.59) 15033.48,10145.68 ; 15032.02,10149.12 cw(c15028.48,10145.59) 15033.48,10145.68 ; 15032.02,10149.12 cw(c15028.48,10145.59) 15033.48,10145.68 ; 15032.02,10149.12 cw(c15028.48,10145.59) 15033.48,10145.68 ; 15032.02,10149.12 cw(c15028.48,10145.59) 15033.48,10145.68 ; 15032.02,10149.12 cw(c15028.48,10145.59) 15033.48,10145.68 ; 15032.02,10149.12 cw(c15028.48,10145.59) 15033.48,10145.68 ; 15032.02,10149.12 cw(c15028.48,10145.59) 15033.48,10145.68 ; 15032.02,10149.12 cw(c15028.48,10145.59) 15033.48,10145.68 ; 15032.02,10149.12 cw(c15028.48,10145.59) 15033.48,10145.68 ; 15032.02,10149.12 15022.1,10159.1 cw(c15032.99,10169.94) 15021.47,10180.12 15032.23,10192.29 ; 15032.23,10192.29 ccw(c15028.48,10195.6) 15033.48,10195.51 ; 15032.23,10192.29 ccw(c15028.48,10195.6) 15033.48,10195.51 ; 15032.23,10192.29 ccw(c15028.48,10195.6) 15033.48,10195.51 ; 15032.23,10192.29 ccw(c15028.48,10195.6) 15033.48,10195.51 ; 15032.23,10192.29 ccw(c15028.48,10195.6) 15033.48,10195.51 ; 15032.23,10192.29 ccw(c15028.48,10195.6) 15033.48,10195.51 ; 15032.23,10192.29 ccw(c15028.48,10195.6) 15033.48,10195.51 ; 15032.23,10192.29 ccw(c15028.48,10195.6) 15033.48,10195.51 ; 15032.23,10192.29 ccw(c15028.48,10195.6) 15033.48,10195.51 ; 15032.23,10192.29 ccw(c15028.48,10195.6) 15033.48,10195.51 ; 15032.23,10192.29 ccw(c15028.48,10195.6) 15033.48,10195.51 ; 15032.23,10192.29 ccw(c15028.48,10195.6) 15033.48,10195.51 ; 15032.23,10192.29 ccw(c15028.48,10195.6) 15033.48,10195.51 ; 15032.23,10192.29 ccw(c15028.48,10195.6) 15033.48,10195.51 ; 15032.23,10192.29 ccw(c15028.48,10195.6) 15033.48,10195.51 ; 15032.23,10192.29 ccw(c15028.48,10195.6) 15033.48,10195.51 ; 15032.99,10340.73 cw(c15037.99,10340.73) 15034.44,10344.25 ; 15032.99,10340.73 cw(c15037.99,10340.73) 15034.44,10344.25 ; 15032.99,10340.73 cw(c15037.99,10340.73) 15034.44,10344.25 ; 15032.99,10340.73 cw(c15037.99,10340.73) 15034.44,10344.25 ; 15032.99,10340.73 cw(c15037.99,10340.73) 15034.44,10344.25 ; 15032.99,10340.73 cw(c15037.99,10340.73) 15034.44,10344.25 ; 15032.99,10340.73 cw(c15037.99,10340.73) 15034.44,10344.25 ; 15032.99,10340.73 cw(c15037.99,10340.73) 15034.44,10344.25 ; 15032.99,10340.73 cw(c15037.99,10340.73) 15034.44,10344.25 ; 15032.99,10340.73 cw(c15037.99,10340.73) 15034.44,10344.25 ; 15032.99,10340.73 cw(c15037.99,10340.73) 15034.44,10344.25 ; 15032.99,10340.73 cw(c15037.99,10340.73) 15034.44,10344.25 ; 15032.99,10340.73 cw(c15037.99,10340.73) 15034.44,10344.25 ; 15032.99,10340.73 cw(c15037.99,10340.73) 15034.44,10344.25 ; 15032.99,10340.73 cw(c15037.99,10340.73) 15034.44,10344.25 ; 15032.99,10340.73 cw(c15037.99,10340.73) 15034.44,10344.25 ; 15034.44,10344.25 15125.19,10435 cw(c15163.98,10396.01) 15141.2,10446.07 15191.42,10468.92 cw(c15218.49,10409.41) 15192.68,10469.47 15264.91,10500.5 ; 15264.91,10500.5 ccw(c15258.85,10514.63) 15270.8,10504.96 ; 15264.91,10500.5 ccw(c15258.85,10514.63) 15270.8,10504.96 ; 15264.91,10500.5 ccw(c15258.85,10514.63) 15270.8,10504.96 ; 15264.91,10500.5 ccw(c15258.85,10514.63) 15270.8,10504.96 ; 15264.91,10500.5 ccw(c15258.85,10514.63) 15270.8,10504.96 ; 15264.91,10500.5 ccw(c15258.85,10514.63) 15270.8,10504.96 ; 15264.91,10500.5 ccw(c15258.85,10514.63) 15270.8,10504.96 ; 15264.91,10500.5 ccw(c15258.85,10514.63) 15270.8,10504.96 ; 15264.91,10500.5 ccw(c15258.85,10514.63) 15270.8,10504.96 ; 15264.91,10500.5 ccw(c15258.85,10514.63) 15270.8,10504.96 ; 15264.91,10500.5 ccw(c15258.85,10514.63) 15270.8,10504.96 ; 15264.91,10500.5 ccw(c15258.85,10514.63) 15270.8,10504.96 ; 15264.91,10500.5 ccw(c15258.85,10514.63) 15270.8,10504.96 ; 15264.91,10500.5 ccw(c15258.85,10514.63) 15270.8,10504.96 ; 15264.91,10500.5 ccw(c15258.85,10514.63) 15270.8,10504.96 ; 15264.91,10500.5 ccw(c15258.85,10514.63) 15270.8,10504.96
  Bottom 6+gnd w5: U4.32@15033.24,10232.03 v1@15033.24,10293.87
AA8: IC2.54 U3.33 U4.33 | length 1491.1
  Top Layer 1 w5: U3.33@15064.73,9771.4 v1@15064.73,9833.24 ; v1(15316.7,10544.63) 15316.78,10544.55 15316.78,10461.95 IC2.54@15316.92,10461.87
  Layer 3 w5: v1(15064.98,9833.49) 15064.98,10145.64 ; 15064.98,10195.56 15064.98,10293.63 v1(15064.49,10294.12) 15064.49,10358.09 ; v1(15316.7,10544.63) 15299.87,10516.69 cw(c15286.7,10524.63) 15296.48,10512.77 15274.98,10495.05 cw(c15258.85,10514.63) 15268.86,10491.31 15196.68,10460.31 ; 15063.52,10149.12 cw(c15059.98,10145.59) 15064.98,10145.68 ; 15063.52,10149.12 cw(c15059.98,10145.59) 15064.98,10145.68 ; 15063.52,10149.12 cw(c15059.98,10145.59) 15064.98,10145.68 ; 15063.52,10149.12 cw(c15059.98,10145.59) 15064.98,10145.68 ; 15063.52,10149.12 cw(c15059.98,10145.59) 15064.98,10145.68 ; 15063.52,10149.12 cw(c15059.98,10145.59) 15064.98,10145.68 ; 15063.52,10149.12 cw(c15059.98,10145.59) 15064.98,10145.68 ; 15063.52,10149.12 cw(c15059.98,10145.59) 15064.98,10145.68 ; 15063.52,10149.12 cw(c15059.98,10145.59) 15064.98,10145.68 ; 15063.52,10149.12 cw(c15059.98,10145.59) 15064.98,10145.68 ; 15063.52,10149.12 cw(c15059.98,10145.59) 15064.98,10145.68 ; 15063.52,10149.12 cw(c15059.98,10145.59) 15064.98,10145.68 ; 15063.52,10149.12 cw(c15059.98,10145.59) 15064.98,10145.68 ; 15063.52,10149.12 cw(c15059.98,10145.59) 15064.98,10145.68 ; 15063.52,10149.12 cw(c15059.98,10145.59) 15064.98,10145.68 ; 15063.52,10149.12 cw(c15059.98,10145.59) 15064.98,10145.68 ; 15063.52,10149.12 15053.59,10159.1 cw(c15064.49,10169.94) 15052.96,10180.12 15063.72,10192.29 ; 15063.72,10192.29 ccw(c15059.98,10195.6) 15064.98,10195.51 ; 15063.72,10192.29 ccw(c15059.98,10195.6) 15064.98,10195.51 ; 15063.72,10192.29 ccw(c15059.98,10195.6) 15064.98,10195.51 ; 15063.72,10192.29 ccw(c15059.98,10195.6) 15064.98,10195.51 ; 15063.72,10192.29 ccw(c15059.98,10195.6) 15064.98,10195.51 ; 15063.72,10192.29 ccw(c15059.98,10195.6) 15064.98,10195.51 ; 15063.72,10192.29 ccw(c15059.98,10195.6) 15064.98,10195.51 ; 15063.72,10192.29 ccw(c15059.98,10195.6) 15064.98,10195.51 ; 15063.72,10192.29 ccw(c15059.98,10195.6) 15064.98,10195.51 ; 15063.72,10192.29 ccw(c15059.98,10195.6) 15064.98,10195.51 ; 15063.72,10192.29 ccw(c15059.98,10195.6) 15064.98,10195.51 ; 15063.72,10192.29 ccw(c15059.98,10195.6) 15064.98,10195.51 ; 15063.72,10192.29 ccw(c15059.98,10195.6) 15064.98,10195.51 ; 15063.72,10192.29 ccw(c15059.98,10195.6) 15064.98,10195.51 ; 15063.72,10192.29 ccw(c15059.98,10195.6) 15064.98,10195.51 ; 15063.72,10192.29 ccw(c15059.98,10195.6) 15064.98,10195.51 ; 15064.49,10358.09 cw(c15069.49,10358.09) 15065.93,10361.6 ; 15064.49,10358.09 cw(c15069.49,10358.09) 15065.93,10361.6 ; 15064.49,10358.09 cw(c15069.49,10358.09) 15065.93,10361.6 ; 15064.49,10358.09 cw(c15069.49,10358.09) 15065.93,10361.6 ; 15064.49,10358.09 cw(c15069.49,10358.09) 15065.93,10361.6 ; 15064.49,10358.09 cw(c15069.49,10358.09) 15065.93,10361.6 ; 15064.49,10358.09 cw(c15069.49,10358.09) 15065.93,10361.6 ; 15064.49,10358.09 cw(c15069.49,10358.09) 15065.93,10361.6 ; 15064.49,10358.09 cw(c15069.49,10358.09) 15065.93,10361.6 ; 15064.49,10358.09 cw(c15069.49,10358.09) 15065.93,10361.6 ; 15064.49,10358.09 cw(c15069.49,10358.09) 15065.93,10361.6 ; 15064.49,10358.09 cw(c15069.49,10358.09) 15065.93,10361.6 ; 15064.49,10358.09 cw(c15069.49,10358.09) 15065.93,10361.6 ; 15064.49,10358.09 cw(c15069.49,10358.09) 15065.93,10361.6 ; 15064.49,10358.09 cw(c15069.49,10358.09) 15065.93,10361.6 ; 15064.49,10358.09 cw(c15069.49,10358.09) 15065.93,10361.6 ; 15065.93,10361.6 15132.24,10427.91 ; 15132.24,10427.91 cw(c15163.98,10396.01) 15145.34,10436.97 ; 15132.24,10427.91 cw(c15163.98,10396.01) 15145.34,10436.97 ; 15132.24,10427.91 cw(c15163.98,10396.01) 15145.34,10436.97 ; 15132.24,10427.91 cw(c15163.98,10396.01) 15145.34,10436.97 ; 15132.24,10427.91 cw(c15163.98,10396.01) 15145.34,10436.97 ; 15132.24,10427.91 cw(c15163.98,10396.01) 15145.34,10436.97 ; 15132.24,10427.91 cw(c15163.98,10396.01) 15145.34,10436.97 ; 15132.24,10427.91 cw(c15163.98,10396.01) 15145.34,10436.97 ; 15132.24,10427.91 cw(c15163.98,10396.01) 15145.34,10436.97 ; 15132.24,10427.91 cw(c15163.98,10396.01) 15145.34,10436.97 ; 15132.24,10427.91 cw(c15163.98,10396.01) 15145.34,10436.97 ; 15132.24,10427.91 cw(c15163.98,10396.01) 15145.34,10436.97 ; 15132.24,10427.91 cw(c15163.98,10396.01) 15145.34,10436.97 ; 15132.24,10427.91 cw(c15163.98,10396.01) 15145.34,10436.97 ; 15132.24,10427.91 cw(c15163.98,10396.01) 15145.34,10436.97 ; 15132.24,10427.91 cw(c15163.98,10396.01) 15145.34,10436.97 ; 15145.34,10436.97 15195.56,10459.81 ; 15195.56,10459.81 cw(c15218.49,10409.41) 15196.68,10460.31 ; 15195.56,10459.81 cw(c15218.49,10409.41) 15196.68,10460.31 ; 15195.56,10459.81 cw(c15218.49,10409.41) 15196.68,10460.31 ; 15195.56,10459.81 cw(c15218.49,10409.41) 15196.68,10460.31 ; 15195.56,10459.81 cw(c15218.49,10409.41) 15196.68,10460.31 ; 15195.56,10459.81 cw(c15218.49,10409.41) 15196.68,10460.31 ; 15195.56,10459.81 cw(c15218.49,10409.41) 15196.68,10460.31 ; 15195.56,10459.81 cw(c15218.49,10409.41) 15196.68,10460.31 ; 15195.56,10459.81 cw(c15218.49,10409.41) 15196.68,10460.31 ; 15195.56,10459.81 cw(c15218.49,10409.41) 15196.68,10460.31 ; 15195.56,10459.81 cw(c15218.49,10409.41) 15196.68,10460.31 ; 15195.56,10459.81 cw(c15218.49,10409.41) 15196.68,10460.31 ; 15195.56,10459.81 cw(c15218.49,10409.41) 15196.68,10460.31 ; 15195.56,10459.81 cw(c15218.49,10409.41) 15196.68,10460.31 ; 15195.56,10459.81 cw(c15218.49,10409.41) 15196.68,10460.31 ; 15195.56,10459.81 cw(c15218.49,10409.41) 15196.68,10460.31
  Bottom 6+gnd w5: U4.33@15064.73,10232.03 v1@15064.73,10293.87